# Allegro board DCPOWER2303.brd
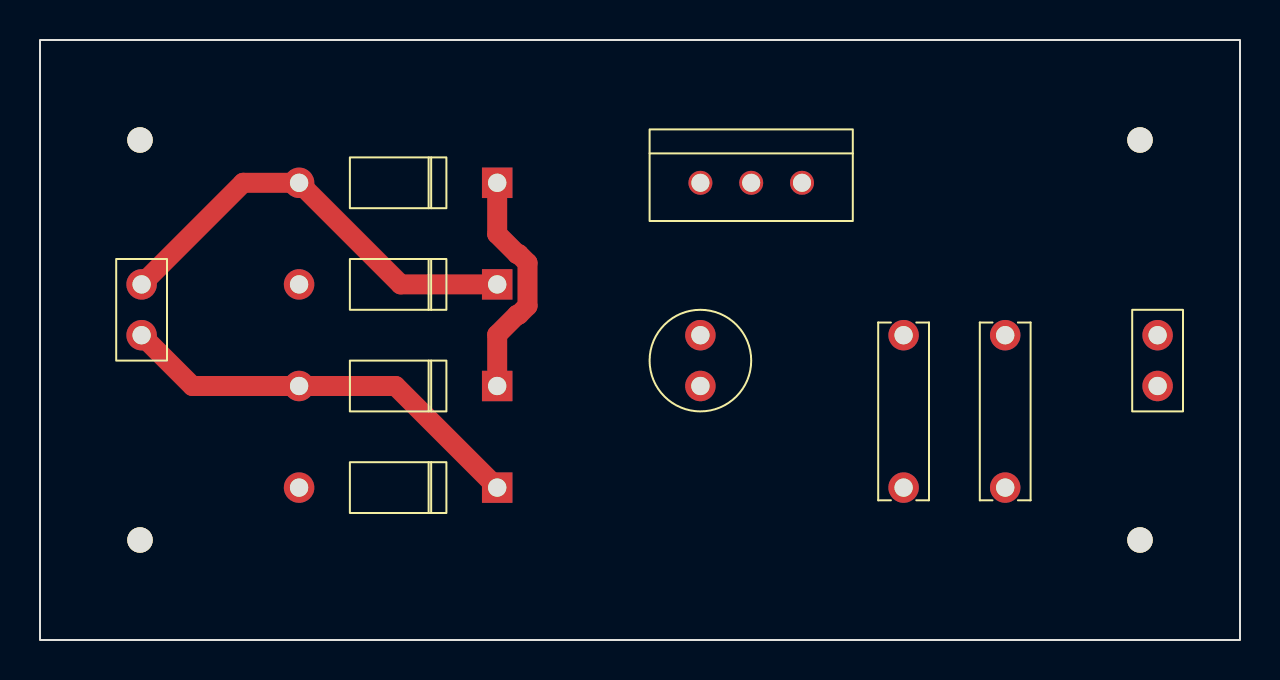
[diagram p0: board, top side]
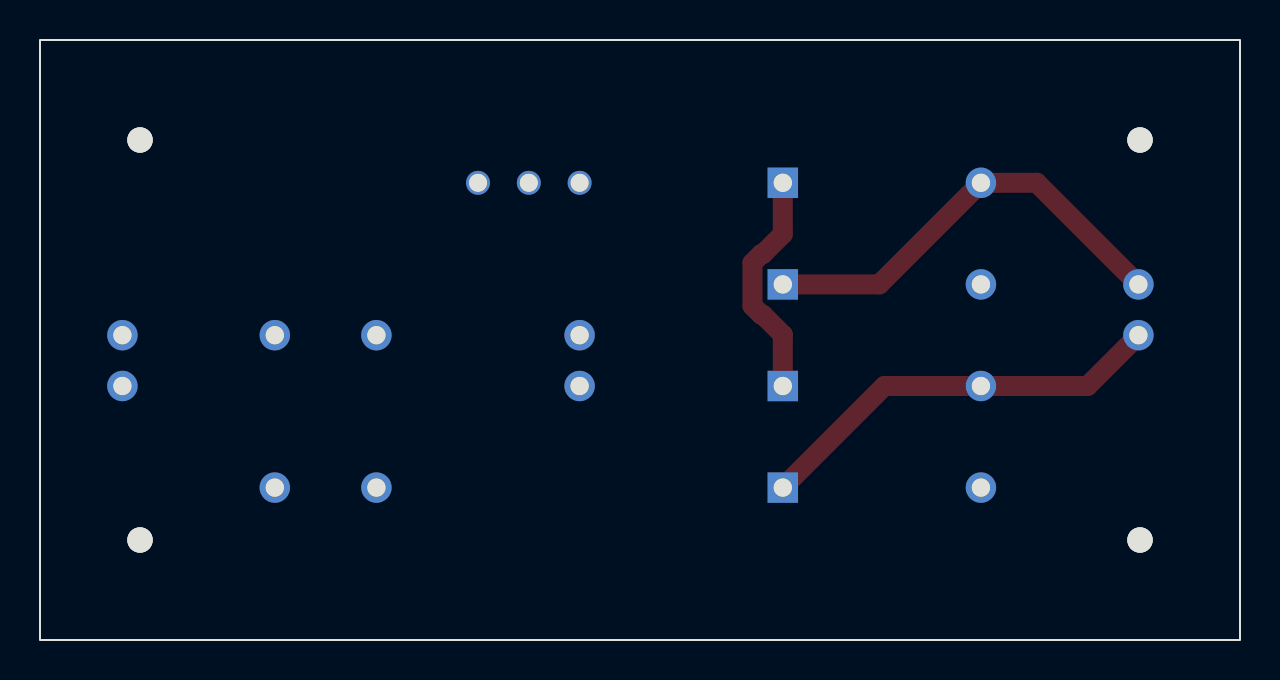
[diagram p1: board, bottom side, seen from below]

Outline 60 x 30 mm; copper layers: TOP, BOTTOM. Coordinates in mm from the lower left corner of the outline.
Outline path: rectangle 0,0 60,30

## Design rules (mm)
nets with their own width: min track width 2; nets GND

## Placement (name value [footprint] x y rotation side)
C1  470uF  [CAP196]  33.02 15.24 180 top
C2  0.33uF  [CAP300]  43.18 15.24 270 top
C3  0.1uF  [CAP300]  48.26 15.24 270 top
D1  1N4001  [DO41]  22.86 17.78 90 top
D2  1N4001  [DO41]  22.86 22.86 90 top
D3  1N4001  [DO41]  22.86 7.62 90 top
D4  1N4001  [DO41]  22.86 12.7 90 top
J1  AC 6V  [JUMPER2]  5.08 17.78 270 top
J2  DC OUT  [JUMPER2]  55.88 15.24 270 top
NOREF  -  [unnamed]  5 25 0 top
NOREF#2  -  [unnamed]  55 5 0 top
NOREF#3  -  [unnamed]  5 5 0 top
NOREF#4  -  [unnamed]  55 25 0 top
U1  LM7805/TO  [TO220]  35.56 22.86 0 top

## Library data of the parts
C1 = CAP POL: Tolerance: ***; User Part Number: ***
C2 C3 = CAP NP: Tolerance: ***; User Part Number: ***
D1-D4 = DIODE
J1 J2 = CON2: User Part Number: ***
U1 = LM7805/TO_9

## Footprints (pads in the part's own frame, mm; a bottom-side part is the same pattern mirrored in y, then rotated)
CAP196
  round 1.524 hole 0.914: 1(0,0) 2(0,2.54)
CAP300
  round 1.524 hole 0.914: 1(0,0) 2(7.62,0)
DO41
  rect 1.524x1.524 hole 0.914: 1(0,0)
  round 1.524 hole 0.914: 2(0,9.906)
JUMPER2
  round 1.524 hole 0.914: 1(0,0) 2(2.54,0)
TO220
  round 1.2 hole 0.9: 1(-2.54,0) 2(0,0) 3(2.54,0)
unnamed
  round 1.27 hole 3 unplated: (0,0)

## Nets
GND: C1.2 C2.2 C3.2 D1.2(A) D3.2(A) J2.2 U1.2
N06398: C1.1 C2.1 D2.1(K) D4.1(K) U1.1(VIN)
N06454: D3.1(K) D4.2(A) J1.2
N06470: D1.1(K) D2.2(A) J1.1
N06510: C3.1 J2.1 U1.3(VOUT)

## Routing (per net, layer and track width the routed paths; a pad name or vN(x,y) marks a point on that pad's centre or on a via; arc(x,y) is an arc through that point)
N06398: length 11.5
  TOP w1: D4.1 22.86,15.26 23.86,16.26 23.93,16.26 24.38,16.71 24.38,18.85 23.93,19.3 23.86,19.3 22.86,20.3 D2.1
N06454: length 20.9
  TOP w1: D3.1 17.78,12.7 D4.2 7.62,12.7 J1.2
N06470: length 22
  TOP w1: D1.1 18.03,17.78 D2.2 10.16,22.86 J1.1
